# Altium PCB BCM_ECU_revA_V3.PcbDoc (part 3 of 7)
Units mm, origin at the board's own origin, x right, y up, seen from the top; angles counter-clockwise.
Board outline 109.5 x 156 mm, 4 copper layers (TOP SIG, GND, PWR, BOT SIG), stack 0.603 mm thick; 580 components, 446 nets, 1965 pads, 870 vias.
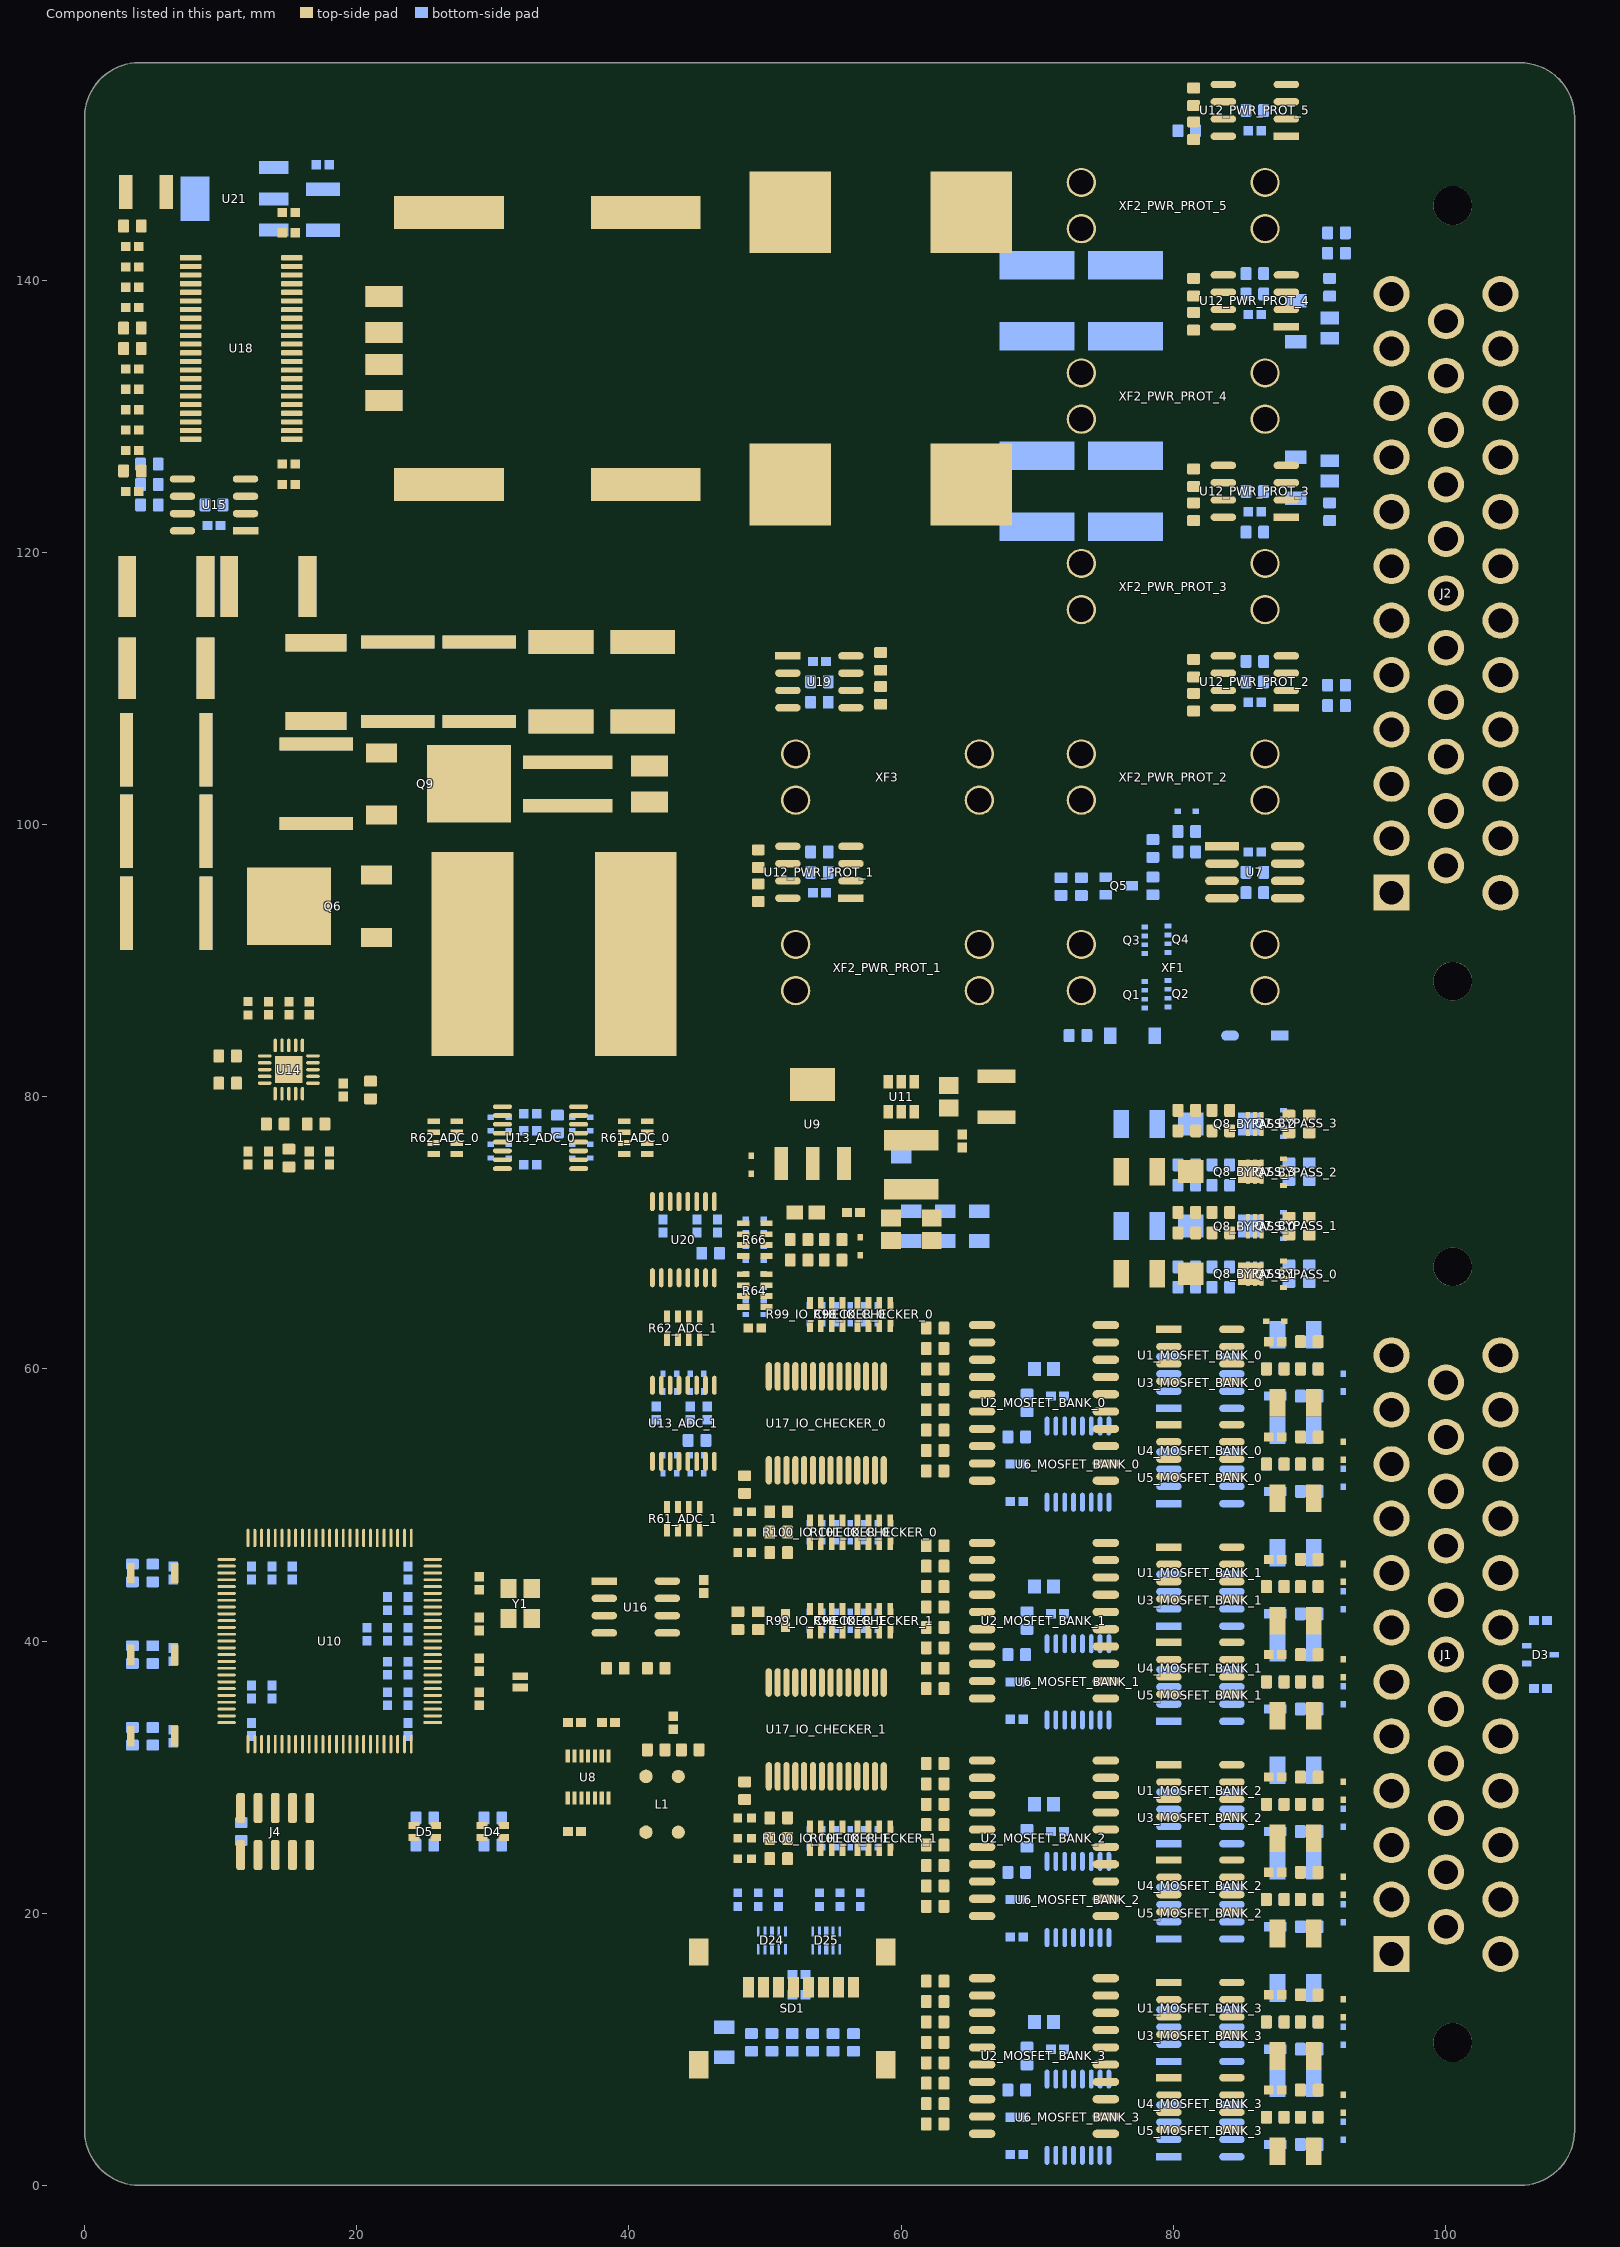
[diagram p4: the components of this part, seen from the top]

## Part data (continued)
R61_ADC_0 R61_ADC_1 R62_ADC_0 R62_ADC_1 R64 R66 R98_IO_CHECKER_0 R98_IO_CHECKER_1 R99_IO_CHECKER_0 R99_IO_CHECKER_1 R100_IO_CHECKER_0 R100_IO_CHECKER_1 R101_IO_CHECKER_0 R101_IO_CHECKER_1: library part CMP-1747-00007-1, "Chip Resistor Array, 1 KOhm, +/- 5%, 62.5 mW, -55 to 125 degC, 8-Pin SMD, RoHS, Tape and Reel", Case Code (Imperial)=0603, Case Code (Metric)=1608, Max Operating Temperature="155 degC", Min Operating Temperature="-55 degC", Package Quantity=5000, Power Rating="100 mW", Resistance="330 Ohm", Tolerance=1%, Voltage Rating="50 V", Case\Package=0603, ComponentLink1Description="Manufacturer URL", ComponentLink1URL=http://www.bourns.com/, ComponentLink2Description=Datasheet, ComponentLink2URL=http://www.bourns.com/pdfs/CATCAY.pdf, DatasheetVersion=Sep-14, Height="0.45 mm", Length="1.6 mm", Mount="Surface Mount", PackageDescription="8-Pin Surface Mount Device, Body 1.6 x 3.2 mm, Pitch 0.8 mm", PackageReference=CAY16-J4, Packaging="Tape and Reel", Pins=2, REACH SVHC="No SVHC", RoHSCompliant=true, Voltage Rating (DC)="50 V", Width="0.8 mm"
R85: library part CMP-00597-24927455-1, "KRL6432E-M-R002-G-T1 Metal Foil Low Resistance Chip Resistor (long-side terminal), 2512, RoHS", Case Code (Imperial)=2512, Case Code (Metric)=6432, Max Operating Temperature=155°C, Min Operating Temperature=-55°C, Power Rating=3W, Resistance=2mΩ, Temperature Coefficient=100ppm/°C, Tolerance=2%, Case/Package=2512, Composition="Metal Foil", Height=700µm, Length=3.1mm, Lifecycle Status=Production, Max Thickness=700µm, NexarPartId=24927455, RoHS=Compliant, Termination=SMD/SMT, Weight=40.511469mg, Width=6.3mm
R89 R102_IO_CHECKER_0 R102_IO_CHECKER_1 R103_IO_CHECKER_0 R103_IO_CHECKER_1 R104_IO_CHECKER_0 R104_IO_CHECKER_1 R112 R113 R114 R115 R117 R118: library part CMP-009-00118-2, "READ THE NAME", Component Type=Standard, Design Item ID=CMP-009-00206-2, Pins=2, Source=0402jump.SchLib
SD1: library part CMP-2000-05245-1, "MicroSD Card Connector, Hinge Type, -40 to 85 degC, 8-Pin SMD, RoHS, Tape and Reel", Current Rating=500mA, Manufacturer=Molex, Voltage Rating=100VDC, Brand=Molex, Card Type=microSD, Contact Material=CopperAlloy, Datasheet URL=http://www.molex.com/pdm_docs/sd/472192001_sd.pdf, Datasheet Version="Rev. F, 06/2009", Factory Pack Quantity=2400, Housing Material=Thermoplastic, Insertion - Extraction Style=Hinged, Manufacturer URL=http://www.molex.com/, Mounting Style=SMD/SMT, Number of Contacts=8, Packaging=Reel, Pitch=1.09mm, Product=CardConnectors, Product Category=MemoryCardConnectors, RoHS=Details, Series=47219, Termination Style=SMD
SW1 SW2 SW3: library part CMP-10040-000029-1, "SWITCH TACTILE SPST-NO 0.02A 15V", Current Rating=5A, Flammability Rating="UL94 V-0", Insulation Color=Black, Max Operating Temperature=85°C, Min Operating Temperature=-40°C, Operating Force=240gf, Actuator Type=Standard, Connector Type=USB, Contact Plating=Gold, Gender=Receptacle, Illumination Type=Non-Illuminated, Mechanical Life=500000Cycles, Mount="Surface Mount", Number of Contacts=24, Number of Ports=1, Packaging="Tape and Reel", Switch Function=Off-Mom, Switch Travel=0.13mm, Termination=Solder, Throw Configuration=SPST
U1_MOSFET_BANK_0 U1_MOSFET_BANK_1 U1_MOSFET_BANK_2 U1_MOSFET_BANK_3 U3_MOSFET_BANK_0 U3_MOSFET_BANK_1 U3_MOSFET_BANK_2 U3_MOSFET_BANK_3 U4_MOSFET_BANK_0 U4_MOSFET_BANK_1 U4_MOSFET_BANK_2 U4_MOSFET_BANK_3 U5_MOSFET_BANK_0 U5_MOSFET_BANK_1 U5_MOSFET_BANK_2 U5_MOSFET_BANK_3 U12_PWR_PROT_1 U12_PWR_PROT_2 U12_PWR_PROT_3 U12_PWR_PROT_4 U12_PWR_PROT_5 U15 U19: library part CMP-1557-00012-2, "SENSOR CURRENT HALL 12.5A AC/DC", Case/Package=SOIC, Current Sensing=12.5A, Frequency=100kHz, Max Operating Temperature=125°C, Max Supply Current=5.5mA, Max Supply Voltage=5.5V, Min Operating Temperature=-40°C, Min Supply Voltage=3V, Operating Supply Voltage=3.3V, Package Quantity=1, Quiescent Current=4mA, -3db Bandwidth=100kHz, Accuracy=5%, Bandwidth=100kHz, Height=1.5mm, Length=4.9mm, Linearity=1%, Number of Channels=1, Number of Pins=8, Packaging="Tape and Reel", Polarity=Bidirectional, REACH SVHC="No SVHC", Response Time=4.6us, RoHS Compliant=Yes, Sensitivity=110mV/A, Series=-, Width=3.9mm
U2_MOSFET_BANK_0 U2_MOSFET_BANK_1 U2_MOSFET_BANK_2 U2_MOSFET_BANK_3: library part CMP-1095-00041-1, "Smart High-Side Power Switch for Industrial Applications 4 Channels: 4 x 140 mOhm Status Feedback, 5.5 to 40 V Operating, -30 to 85 degC, PG-DSO-20-32, Reel, Green", Load Current (typ)="1.3Â A", Manufacturer=Infineon, Operating Voltage Range (max)="40 V", Operating Voltage Range (min)="5.5Â V", Channels=4, ComponentLink1Description="Manufacturer URL", ComponentLink1URL=http://www.infineon.com/, ComponentLink2Description=Datasheet, ComponentLink2URL=http://www.infineon.com/dgdl/ITS716G_DS11_20081002.pdf?folderId=db3a304412b407950112b408e8c90004&fileId=db3a304412b407950112b428c2cf3e6d, ComponentLink3Description="Package Specification", ComponentLink3URL=http://www.infineon.com/dgdl/BTS+4130QGA_DS10+_neu.pdf?folderId=db3a304314dca389011537739e37155f&fileId=db3a30431a5c32f2011a957932285680&sId=db3a30433d68e984013d7f42d6576278, DatasheetVersion="Rev. 1.1", Diagnostic=Digital, Green=TRUE, Halogen-free=available, IL (nom)min - all channels active="1.3Â A", IL (nom)min - one channel active="2.3Â A", IL (SC)="9 A", IL (SCp)="9 A", Mounting Technology="Surface Mount", PackageDescription="20-Pin Plastic (Green) Dual Small Outline Package, 12.7 x 7.5 mm Body, 1.27 mm Pitch", PackageReference=PG-DSO-20-32, PackageVersion=Mar-08, Packing=Reel, PartNumber=ITS716G, Ptot (max)="3.6Â W", RON (max) @ Tj max="280 mOhm", RON @ 25 degC="140 mOhm (max)", toff (max)="270 us", ton (max)="250 us"
U6_MOSFET_BANK_0 U6_MOSFET_BANK_1 U6_MOSFET_BANK_2 U6_MOSFET_BANK_3 U13_ADC_0 U13_ADC_1 U20: library part CMP-0054-00372-2, "8-Channel, 50 kSPS to 200 kSPS, 8-Bit A/D Converter, 16-pin TSSOP, Pb-Free", Manufacturer="National Semiconductor", PackageTopMarking=NSUZXYTT*88S022*CIMT, PowerWise=Y, Code_JEDEC=MO-153-AB, ComponentLink1Description="ADC088S022 Datasheet", ComponentLink1URL=http://www.national.com/ds/AD/ADC088S022.pdf, ComponentLink2Description="ADC088S022 Web Page", ComponentLink2URL=http://www.national.com/pf/AD/ADC088S022.html, ComponentLink3Description="MTC16 Package Page", ComponentLink3URL=http://www.national.com/packaging/folders/mtc16.html, CompType="ADC IC", DatasheetVersion=Feb-2010, PackageDescription="Molded TSSOP, Jedec, 5 x 4.4 x 0.9mm Body, 16 Lead, 0.65mm Pitch", PackageReference=MTC16, PackageVersion="revD, Jun-2003", PinCount=16, RevisionNote="Component URLs added", RoHS=Y
U7: library part CMP-1557-00015-2, "SENSOR CURRENT HALL 25A AC/DC", Case/Package=SOIC, Current Sensing=25A, Frequency=100kHz, Max Operating Temperature=125°C, Max Supply Current=5.5mA, Max Supply Voltage=5.5V, Min Operating Temperature=-40°C, Min Supply Voltage=3V, Operating Supply Voltage=3.3V, Package Quantity=1, Quiescent Current=4mA, -3db Bandwidth=100kHz, Accuracy=4%, Bandwidth=100kHz, Height=1.5mm, Length=4.9mm, Linearity=1%, Number of Channels=1, Number of Pins=8, Packaging="Tape and Reel", Polarity=Bidirectional, REACH SVHC="No SVHC", Response Time=4.6us, RoHS Compliant=Yes, Sensitivity=55mV/A, Series=-, Width=3.9mm
U8: library part CMP-318-000000-2, "Automotive CAN FD transceiver with watchdog, bus diagnostics and partial networking via sele 14-SOT-23-THIN -40 to 150", Component Type=Standard, Design Item ID=CMP-015-00012-2, Pin Count=14, Source=TCAN1146DYYRQ1.SchLib
U9: library part CMP-0244-00311-1, "Fixed Low Drop Positive Voltage Regulator, 5V, 4-Pin SOT-223, Tape and Reel", ComponentLink1Description="Manufacturer URL", ComponentLink1URL=http://www.st.com, ComponentLink2Description=Datasheet, ComponentLink2URL=http://www.st.com/internet/com/TECHNICAL_RESOURCES/TECHNICAL_LITERATURE/DATASHEET/CD00000544.pdf, DatasheetVersion=1/11/2011, PackageDescription="4-Pin SOT-223 Package, 6.5 x 3.5 mm Body, 2.3 mm Pitch, 7 mm Lead Span", PackageReference=SOT-223, PackageVersion=2010
U10: library part CMP-12105-000107-1, "IC MCU 32BIT 128KB FLASH 100LQFP"
U11: library part CMP-12757-000006-1, "IC REG BUCK 3.3V 2A TSOT26", Ambient Temperature Range High=+85°C, Ambient Temperature Range Low=-40°C, Manufacturer="Diodes Inc.", Max Junction Temp=+160°C, Max Supply Voltage=32V, Min Supply Voltage=3.8V, Nominal Supply Current=22uA, Output Current=2A, Output Voltage=3.3V, Package=TSOT26, Switching Frequency=1.1MHz, Temperature="to +160°C", Automotive=No, Category=IC, ComponentLink2Description=Datasheet, ComponentLink2URL=https://www.diodes.com/assets/Datasheets/AP63200-AP63201-AP63203-AP63205.pdf, Device Class L1="Integrated Circuits (ICs)", Device Class L2="Power Management ICs", Device Class L3="Voltage Regulators - Switching", Digikey Description="IC REG BUCK 3.3V 2A TSOT26", Footprint Url=https://www.diodes.com/assets/Package-Files/TSOT26.pdf, Height=1mm, Lead Free=Yes, Manufacturer Part Number=AP63203WU-7, Mouser Description="AP63203 Series 3.3 V 2 A SMT Fixed Low IQ Synchronous Buck - TSOT-26", Number of Outputs=1, Octopart=https://octopart.com/ap63203wu-7-diodes+inc.-98099550, Output Type=Fixed, RoHS=TRUE, Standoff Height=0.01mm, Switching Topology=Buck, Temperature Range High=+160°C
U14: library part CMP-019-00051-1, "2.2-MHz wide-VIN, synchronous boost controller with output voltage tracking 20-VQFN -40 to 125"
U16: library part CMP-07117-000003-1, "IC EEPROM 256K SPI 20MHZ 8SOIC", Frequency=20MHz, Manufacturer="ON Semiconductor", Max Supply Voltage=5.5V, Min Supply Voltage=1.8V, Nominal Supply Current=2-4mA, Package=SOIC8, Temperature="-40°C to +85°C", Temperature Range High=+85°C, Temperature Range Low=-40°C, Automotive=No, Category=IC, ComponentLink2Description=Datasheet, ComponentLink2URL=https://www.onsemi.cn/PowerSolutions/document/CAT25256-D.PDF, Device Class L1="Integrated Circuits (ICs)", Device Class L2=Memory, Device Class L3=EEPROM, Digikey Description="IC EEPROM 256K SPI 20MHZ 8SOIC", Footprint Url=https://www.onsemi.com/pub/Collateral/751BD.PDF, Height=1.75mm, Interface=SPI, Ipc Land Pattern Name=SOIC127P600X155-8, Lead Free=Yes, Manufacturer Part Number=CAT25256VI-GT3, Memory Size=256Kbits, Memory Type=EEPROM, Mouser Description="EEPROM Serial-SPI 256K-bit 32K x 8 2.5V/3.3V/5V 8-Pin SOIC N T/R", Octopart=https://octopart.com/cat25256vi-gt3-on+semiconductor-10567745, RoHS=TRUE, Standoff Height=0.1mm
U17_IO_CHECKER_0 U17_IO_CHECKER_1: library part CMP-0186-00176-2, "16-Bit I/O Expander with Serial Interface, 28-Pin SSOP, Extended Temperature", Code_JEDEC=MS-150, ComponentLink1Description="Manufacturer URL", ComponentLink1URL=http://www.microchip.com/, ComponentLink2Description=Datasheet, ComponentLink2URL=http://ww1.microchip.com/downloads/en/DeviceDoc/21952b.pdf, ComponentLink3Description="Package Specification", ComponentLink3URL=http://www.microchip.com/stellent/groups/techpub_sg/documents/packagingspec/en012702.pdf, DatasheetVersion="revB, Feb-2007", PackageDescription="28-Lead Plastic Shrink Small Outline (SS) - 5.3mm Body [SSOP]", PackageReference=SSOP-SS28, PackageVersion="revBB, Aug-2009", RevisionNote="URLs added."
U18: library part CMP-014-00024-1, "Audio Amplifier, 315W, 4 Channel(s), 1 Func, PDSO44", RoHS Compliant=Yes
U21: library part CMP-0062-01737-4, "IC REG LINEAR 12V 400MA SOT223-4", Case/Package=SOT-223, Current Rating=500A, Dropout Voltage=500mV, Max Input Voltage=26V, Max Operating Temperature=125°C, Max Output Current=500mA, Min Input Voltage=0uV, Min Operating Temperature=-40°C, Nominal Output Voltage=12V, Output Voltage Accuracy=5%, Package Quantity=1000, Quiescent Current=10mA, Accuracy=5%, Contact Plating=Tin, Height=1.6mm, Lead Free="Lead Free", Length=6.5mm, Mount="Surface Mount", Number of Outputs=1, Number of Pins=4, Output Current=500mA, Output Type=Fixed, Output Voltage=12V, Packaging="Tape and Reel", Polarity=Positive, Radiation Hardening=No, REACH SVHC="No SVHC", RoHS Compliant=Yes, Termination=SMD/SMT, Width=3.56mm
XF1 XF2_PWR_PROT_1 XF2_PWR_PROT_2 XF2_PWR_PROT_3 XF2_PWR_PROT_4 XF2_PWR_PROT_5 XF3: library part CMP-2000-05461-1, "FUSE HOLDER, PCB MOUNT, 500VAC, 20A, ROHS", Current Rating=30A, Manufacturer=Keystone-Electronics, Voltage=500V, Category=CircuitProtection, Contact Finish=TinNickel, Contact Material=Brass, Datasheet URL=http://datasheet.octopart.com/3557-2-Keystone-datasheet-15715937.pdf, Datasheet Version=Apr-13, Family=Fuseholders, For Use With/Related Products=ATC,ATO257,MINI897, Fuse Size="0.43\"Lx0.15\"Wx0.64\"H(10.92mmx3.81mmx16.25mm)", Fuse Type=Blade, Fuseholder Type=Block, Manufacturer URL=http://www.keyelco.com/, Mounting Type=PCB, Number of Circuits=1, Orientation=Vertical, Series=-, Termination Style=PCPin
Y1: library part CMP-2000-05733-3, "Crystal 25MHz ±20ppm (Tol) ±30ppm (Stability) 18pF FUND 60Ω 4-Pin SMD T/R", Case/Package=CSMD, ESR (Equivalent Series Resistance)=60R, Frequency=25MHz, Frequency Stability=30ppm, Frequency Tolerance=20ppm, Load Capacitance=18pF, Max Operating Temperature=85°C, Min Operating Temperature=-40°C, Operating Frequency="25 MHz", Package Quantity=1000, Depth=2.5mm, Height=0.039inch, Lead Free="Lead Free", Length=3.2mm, Mount="Surface Mount", Number of Pins=4, Packaging="Tape and Reel", Radiation Hardening=No, Series=ABM8G, Series Resistance=60R, Termination=SMD/SMT, Tolerance=20ppm, Width=0.098inch
Y2: library part CMP-40224-000006-1, "CRYSTAL 32.7680KHZ 12.5PF SMD", Frequency=32.768kHz, Load Capacitance=12.5pF, Manufacturer="ECS International", Package=ECX-1210, Temperature="-40°C to +85°C", Temperature Range High=+85°C, Temperature Range Low=-40°C, Tolerance=20ppm, Automotive=No, Category=Crys, ComponentLink2Description=Datasheet, ComponentLink2URL=https://ecsxtal.com/store/pdf/ECX-1210.pdf, Device Class L1="Passive Components", Device Class L2="Crystals / Oscillators", Device Class L3=Crystals, Digikey Description="CRYSTAL 32.7680KHZ 12.5PF SMD", ESR=90kΩ, Height=0.5mm, Lead Free=Yes, Manufacturer Part Number=ECS-.327-12.5-1210-TR, Octopart=https://octopart.com/ecs-.327-12.5-1210-tr-ecs+international-81221340, RoHS=TRUE, Series=ECX-1210